# Altium PCB MTB.TEMPLATE.PcbDoc (part 3 of 3)
Units mm, origin at the board's own origin, x right, y up, seen from the top; angles counter-clockwise.
Board outline 100 x 100 mm, 2 copper layers (Top Layer, Bottom Layer), stack 1.576 mm thick; 279 components, 187 nets, 803 pads, 2 vias.
Unrouted connection lines stored in the file: 418.
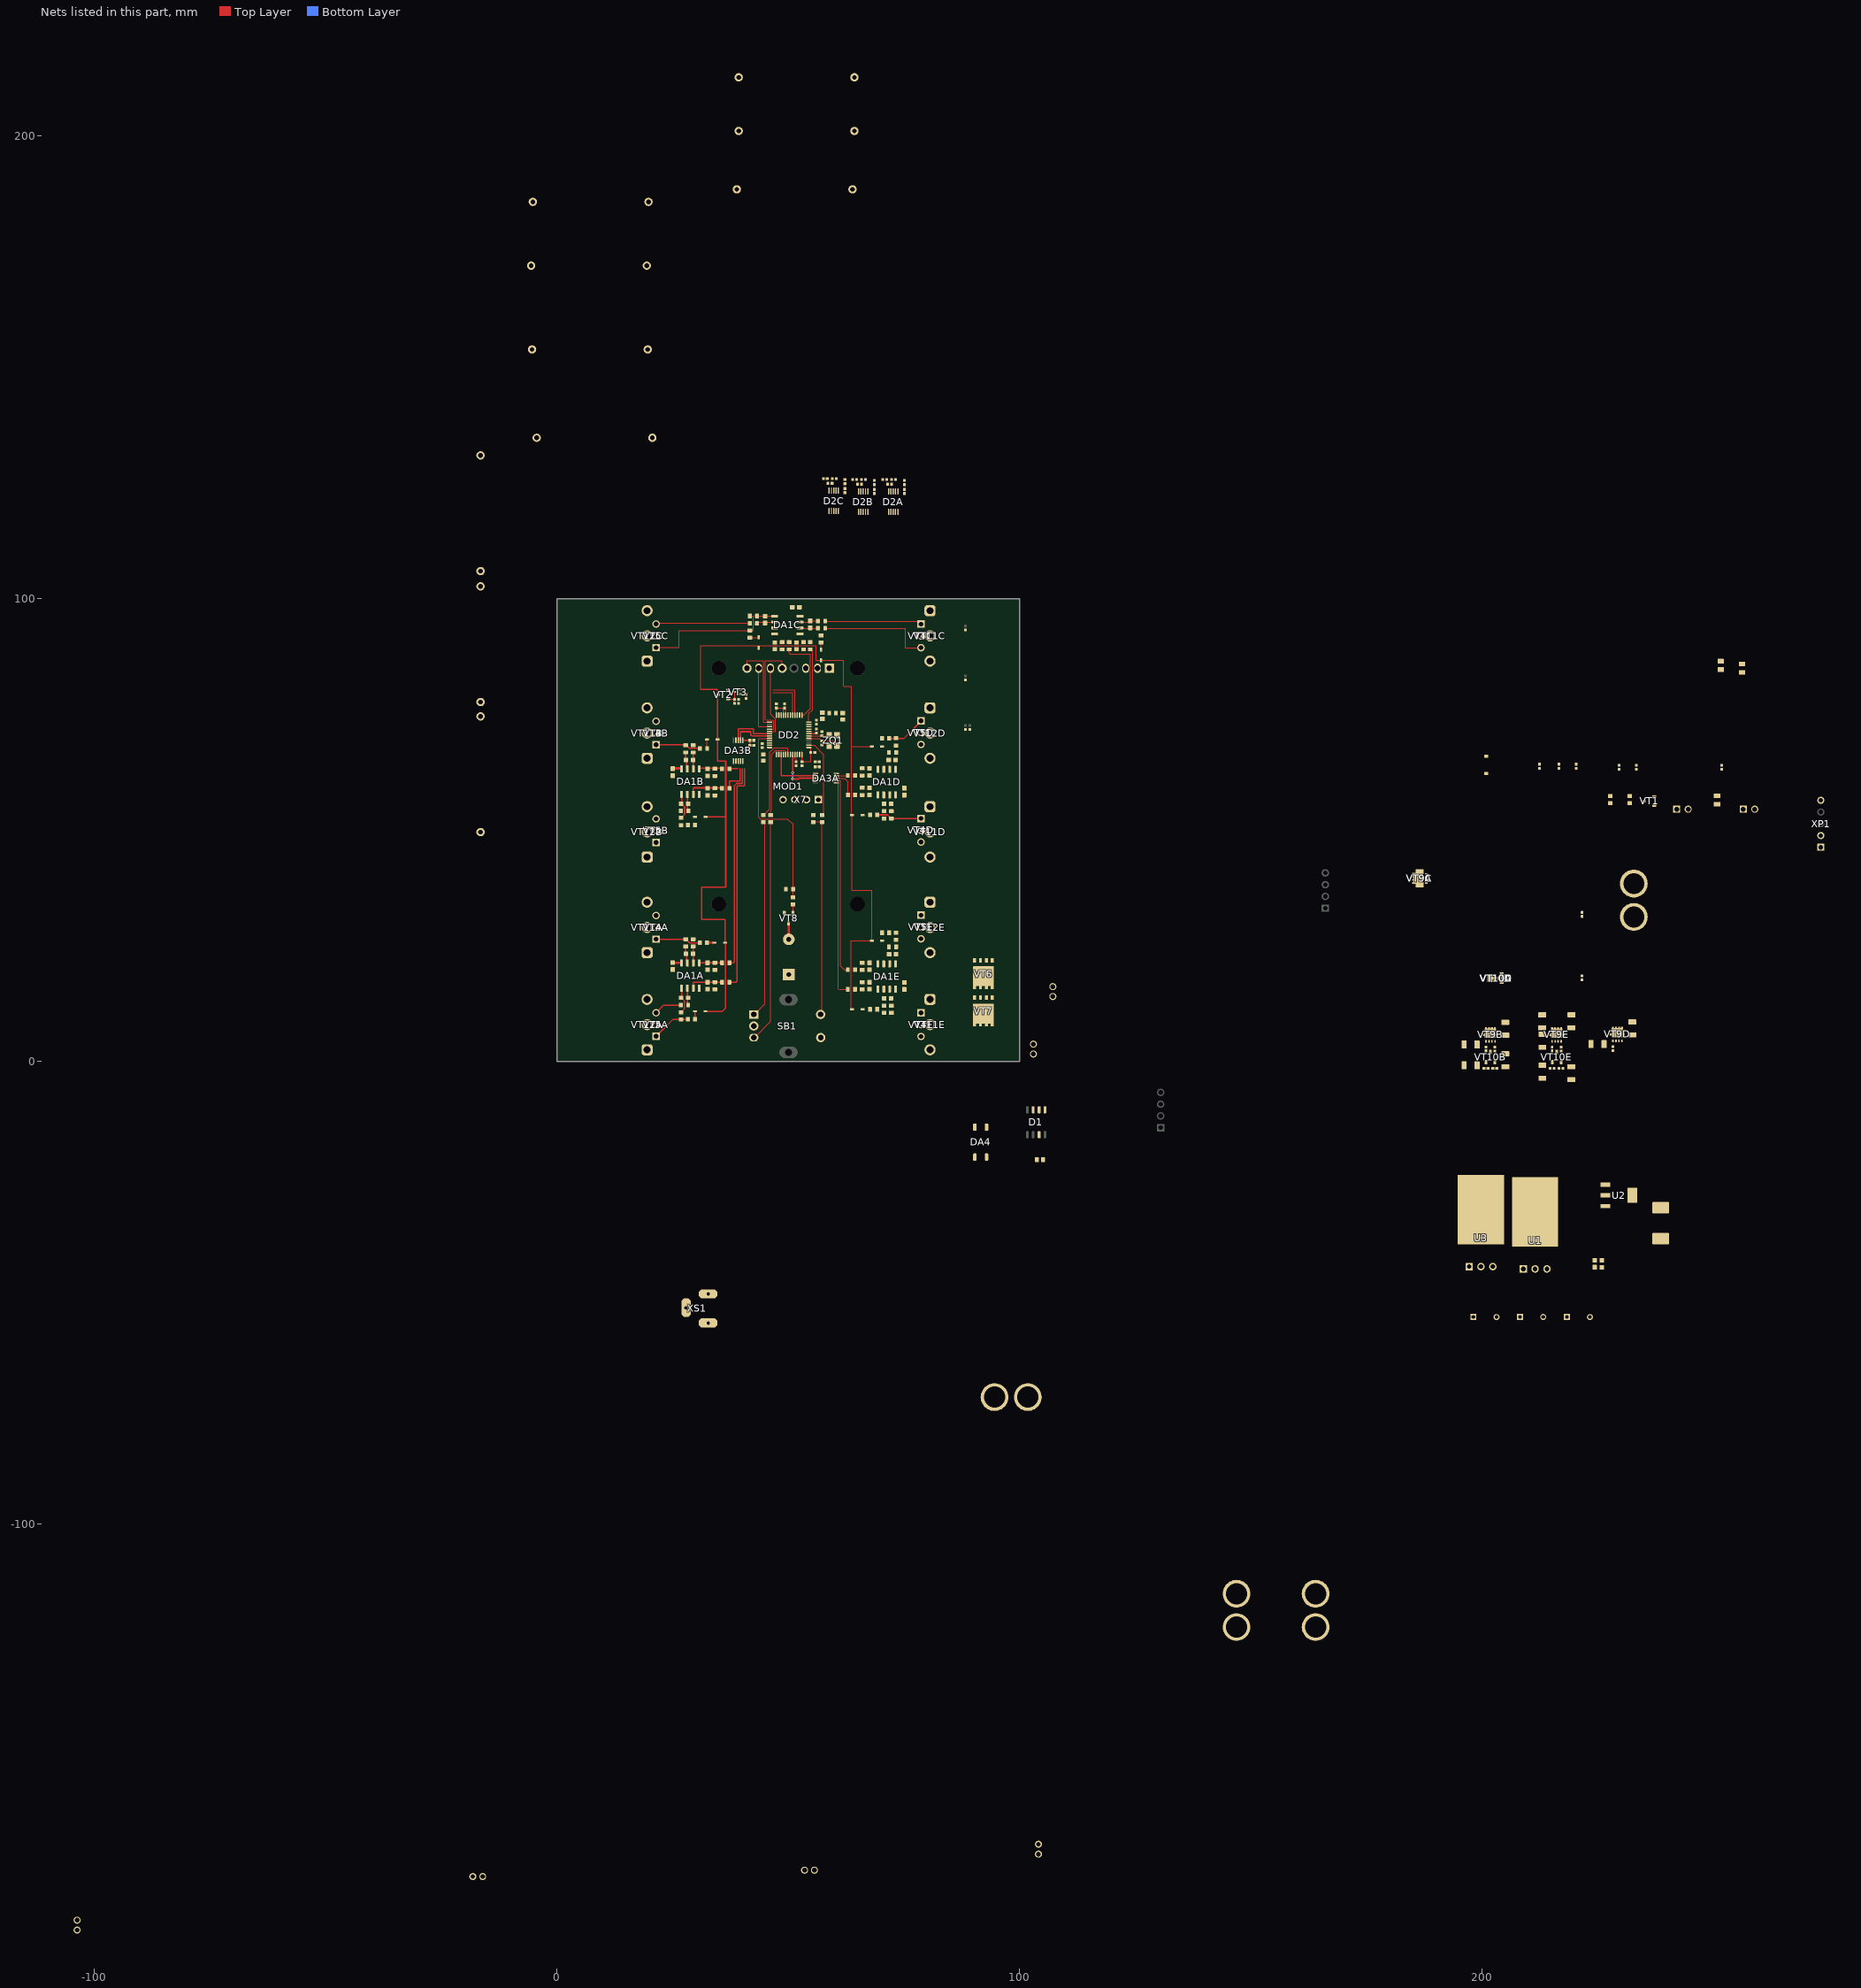
[diagram p2: the nets of this part, all layers, seen from the top]

## Via types
v1: diameter 0.6, hole 0.3, Top Layer to Bottom Layer, tented both sides, 2 vias

## Nets (pads, with @x,y where several pads share a name; then routed paths per layer and width w, separated by ;. In a path a pad name is that pad's centre, name@x,y a point inside that pad or via, vN(x,y) a via of type N, cw(c..) or ccw(c..) an arc to the next point about the centre after c; other vN are vias at no path point) (continued)
VREF7: (continued)
  Top Layer w0.2: DA3A.8@60.388,61.26 62.152,61.26 62.945,60.466 R13D.1@62.945,57.629
VREF8: DA3A.9 R20D.1 | length 2.6
  Top Layer w0.2: DA3A.9@60.388,61.76 62.876,61.76 R20D.1@62.876,61.847
VREF9: DD2.12 R13C.1 | length 16.3
  Top Layer w0.2: DD2.12@54.467,73.36 54.467,75.267 55.267,76.067 55.267,88.66 54.852,89.075 R13C.1@54.777,89.075
VREF10: DD2.13 R20C.1 | length 19.7
  Top Layer w0.2: R20C.1@50.2,89.075 50.2,88.35 50.45,88.1 54.723,88.1 54.84,87.983 54.84,76.283 53.417,74.86 DD2.13@52.967,74.86
xALERT: DD2.17 R11.1 | length 9.2
  Top Layer w0.2: 46.7,79.8 50.967,79.8 DD2.17@50.967,74.86
xENC_A: DD2.42 R43.2 | length 20
  Top Layer w0.2: R43.2@44.6,53.275 44.652,53.275 46,54.623 46,66.807 46.993,67.8 49.967,67.8 DD2.42@49.967,66.36
xENC_B: DD2.41 R45.2 | length 17.3
  Top Layer w0.2: R45.2@46.2,53.275 46.2,54.258 46.4,54.458 46.4,66.38 47.28,67.26 47.653,67.26 49.153,67.26 49.417,66.996 49.417,66.95 49.467,66.9 DD2.41@49.467,66.36
xENC_BUTTON: DD2.2 R9.2 | length 17.2
  Top Layer w0.2: DD2.2@54.467,68.36 55.647,68.36 57.696,66.311 57.696,53.7 57.371,53.375 R9.2@57.317,53.375
xTHERMO_SENS1: 10kD.1 DD2.8 RK1D.1
xTHERMO_SENS2: 10kC.1 DD2.9 RK1C.1
xTHERMO_SENS3: 10kB.1 DD2.10 RK1B.1
xTHERMO_SENS4: 10kE.1 DD2.11 RK1E.1
xTHERMO_SENS5: DD2.14 RK1A.1
xTHERMO_SENS6: DD2.15 RK1F.1
pads on no net: 10kB.2 10kC.2 10kD.2 10kE.2 D1.1 D1.2 D1.4 D1.8 DA3A.5 DA3B.5 DD2.3 DD2.4 DD2.26 MOD1.4 MOD1.MH SB1.MH X5.1 X5.2 X5.3 X5.4 X6.1 X6.2 X6.3 X6.4 XP1.3 XP1.4
copper on no net: | length 46.6
  Top Layer w0.3: 23.1,54.19 26.835,54.19 ; 25.153,51.143 28.331,51.143 ; 29.856,52.862 29.881,52.836 29.881,51.143 ; 64.426,61.847 70.548,61.847 70.665,61.964 70.665,63.14 ; 64.495,57.629 69.364,57.629 69.395,57.66 ; 66.275,53.3 67.675,53.3 ; 70.279,69.847 70.279,68.154 70.304,68.128 ; 70.665,54.135 70.683,54.152 70.683,57.642 70.665,57.66 ; 71.769,66.704 71.935,66.538 71.935,63.14 ; 71.935,57.66 72.085,57.51 72.085,55.856 72.242,55.699 72.271,55.67 72.271,54.129 72.3,54.1 ; 73.205,57.66 73.235,57.63 ; 73.205,63.14 73.205,65.201 ; 73.3,65.201 73.275,65.201 72.55,65.926 72.55,67.55 73.325,68.325 73.325,68.4 ; 73.325,66.8 77.06,66.8 ; 75.07,57.63 75.1,57.6
  Top Layer w0.5: 73.235,57.63 75.07,57.63

## Silkscreen, mask and mechanical layers (free items; w line width, h text height)
Board:
  lines w0.01: 0,0 0,100 100,100 100,0 0,0
  lines w0.1: 10.3,50 82.7,50 ; 18.1,29 82,29 ; 18.1,71 82,71 ; 21,8 82.9,8 ; 21,50 25,50 ; 21,92 82.9,92 ; 25,0 25,100 ; 50,0 50,100 ; 75,0 75,100 ; 224.9,-1.9 224.9,9.5 225.7,9.5 233.6,9.5 233.6,-1.9 224.9,-1.9

## Text inside footprints (layer, text, board x,y; h text height)
C5: Top Overlay "+" at 208.391,-54.413 h1.5; Top Assembly "+" at 207.223,-54.687 h3
C24: Top Overlay "+" at 218.493,-54.426 h1.5; Top Assembly "+" at 217.325,-54.7 h3
C27: Top Assembly "D" at 239.05,-35.15 h0.9 r90
C32: Top Overlay "+" at 198.293,-54.426 h1.5; Top Assembly "+" at 197.125,-54.7 h3